# EAGLE board Stunning Densor (5) (EAGLE 9.7.0)

Size 43.8 x 28.37 mm. Coordinates in mm from the lower left corner, seen from the top.
Outline: 0,0 43.8,0 43.8,28.38 0,28.38 0,0
Copper layers (1*16): Top 0.035mm / dielectric 1.5mm / Bottom 0.035mm
Design rules "default": minimum track width 6mil, minimum drill 0.35mm, track to track 6mil, track to pad 6mil, pad to pad 6mil, via to via 6mil, smd to smd 6mil, copper to edge 40mil, drill to drill 6mil, minimum pad ring 10mil, minimum via ring 8mil, stop-mask expansion 4mil, vias tented up to drill 0mil, thermal gap 10mil

## Footprints (pad centres in the part's own frame; a part is rotated, then mirrored left to right if it is on the bottom)
BATTERY-GENERIC = drill 1.118 pad 3.15 octagon: + 2.54,0; - -2.54,0
LEDRD254W60D565H860B = drill 0.981 pad 1.581: 1 -1.27,0; 2 1.27,0
RESAD1016W63L850D250B = drill 0.83 pad 1.43: 1 -5.08,0; 2 5.08,0
SW-200D = drill 0.85 pad 1.45: 1 -7.15,0; 2 7.15,0

## Placement (x,y rotation side)
BAT3  3V  [BATTERY-GENERIC]  8.26,12.68 270 top
D1  RED  [LEDRD254W60D565H860B]  37.74,20.47 180 top
R5  50  [RESAD1016W63L850D250B]  25.9,6.33 0 top
TILT1  TILT  [SW-200D]  19.55,13.95 0 top

## Library data of the parts
BAT3 R5 TILT1 = Tinkercad
D1 = Tinkercad; CATEGORY: Opto-Electronic; SUB-CATEGORY: LED; VALUE: LED_RED

## Nets
BAT3+: BAT3.+ R5.1
BAT3-: BAT3.- TILT1.1
D1_A: D1.1 R5.2
TILT1_2: D1.2 TILT1.2

## Tracks (layer width: path | path; a pad name or v marks a point on that pad's centre or on a via)
BAT3+  (1 unrouted)
BAT3-  (1 unrouted)
D1_A  (1 unrouted)
TILT1_2  (1 unrouted)